# EAGLE board v1 (EAGLE 7.6.0)
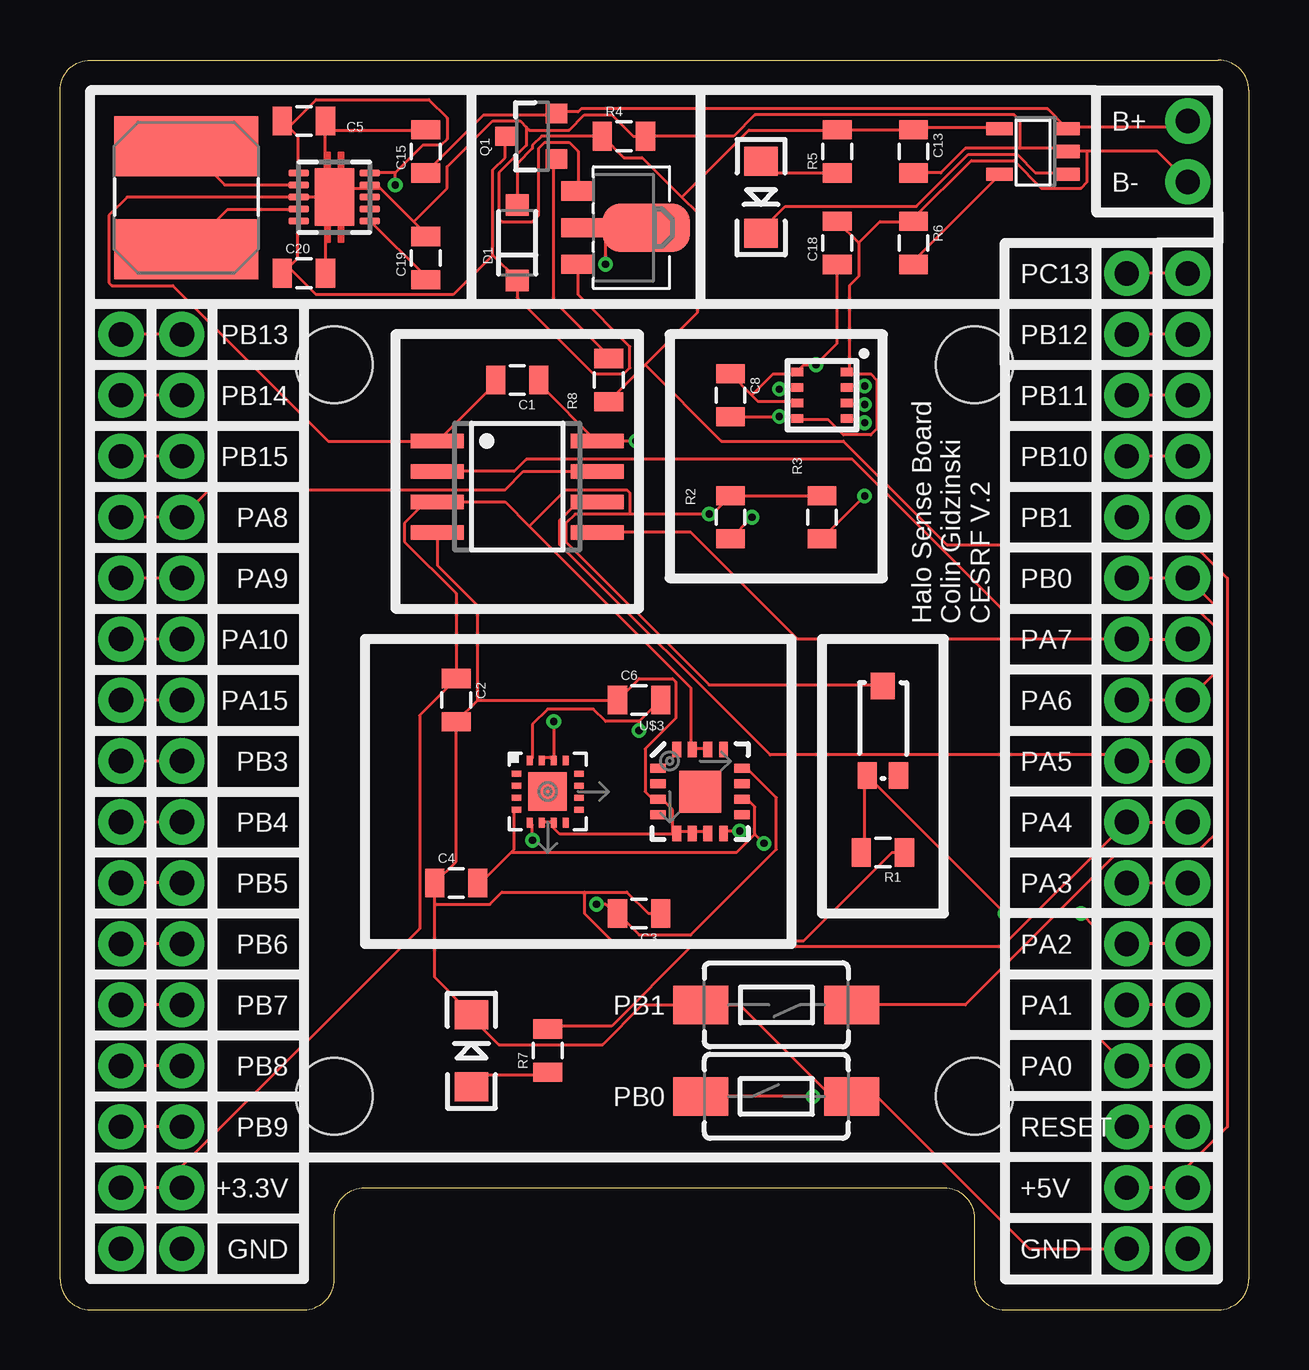
[diagram p0: board, top side]
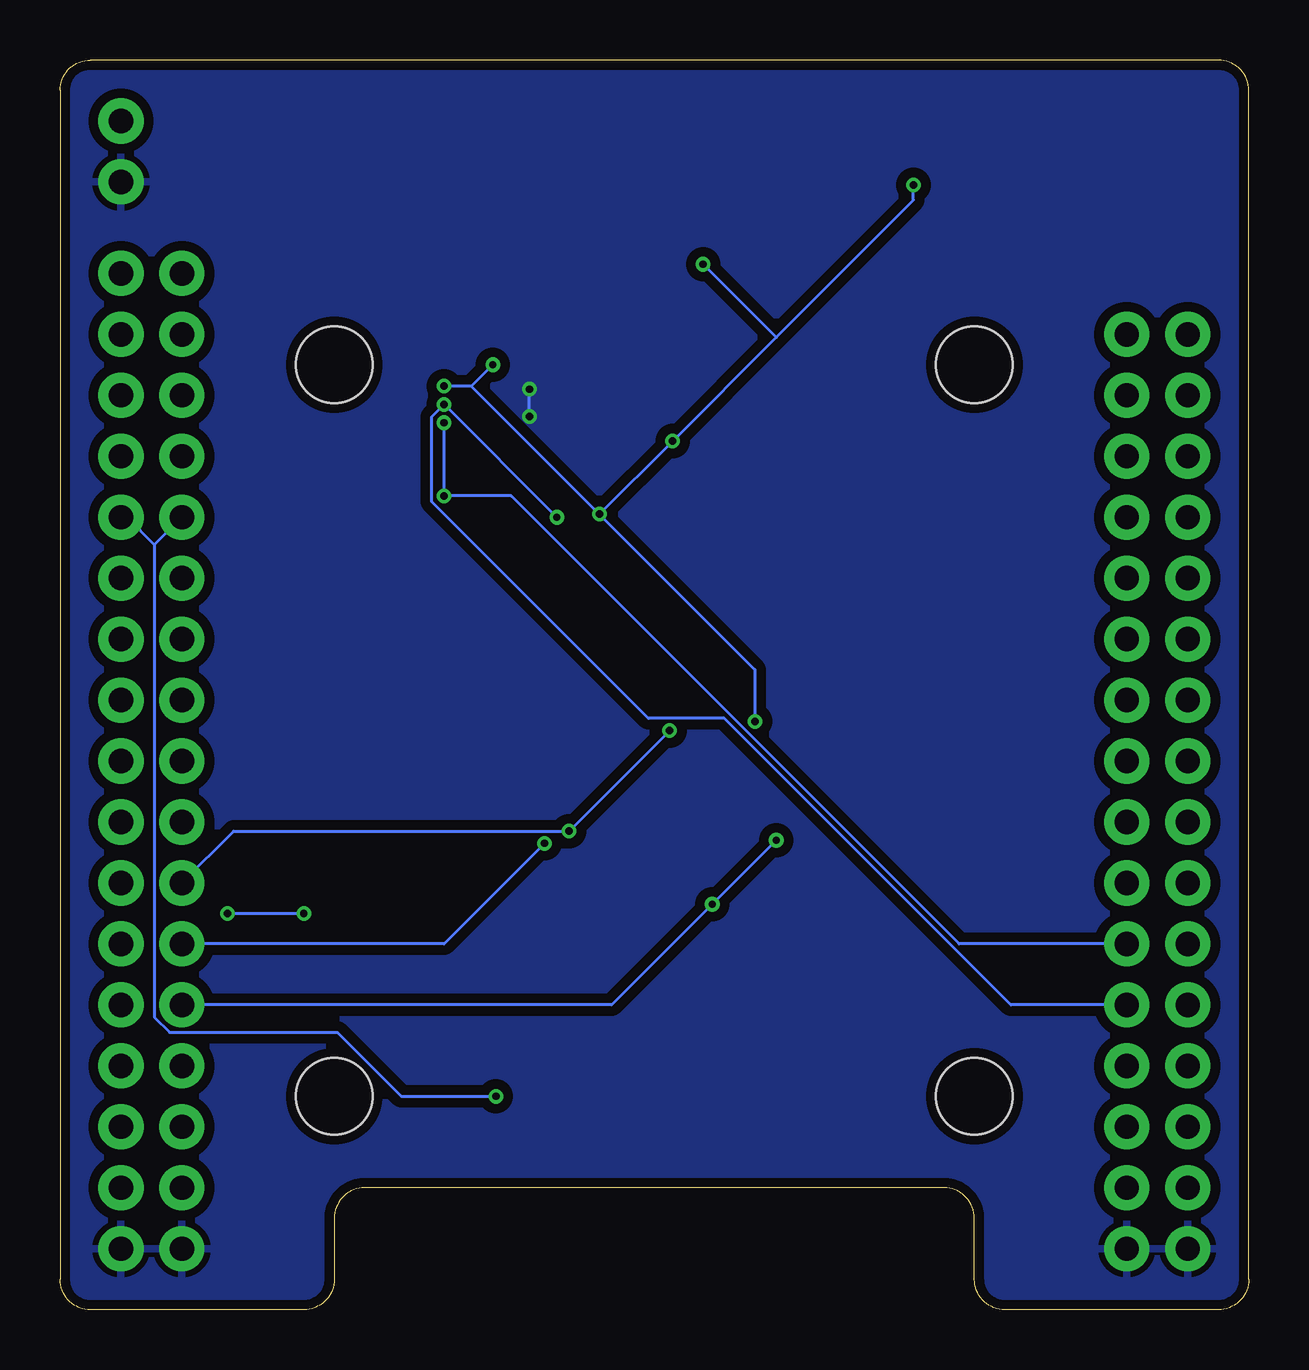
[diagram p1: board, bottom side, seen from below]

Size 49.53 x 52.07 mm. Coordinates in mm from the lower left corner, seen from the top.
Outline: 1.27,52.07 48.26,52.07 arc-90 49.53,50.8 49.53,1.27 arc-90 48.26,0 39.37,0 arc-90 38.1,1.27 38.1,3.81 arc90 36.83,5.08 12.7,5.08 arc90 11.43,3.81 11.43,1.27 arc-90 10.16,0 1.27,0 arc-90 0,1.27 0,50.8 arc-90 1.27,52.07
Copper layers (1*16): Top 0.035mm / dielectric 1.5mm / Bottom 0.035mm
Design rules "dirt_cheap_dirty_boards.v1": minimum track width 5mil, minimum drill 12mil, track to track 5mil, track to pad 5mil, pad to pad 5mil, via to via 5mil, smd to smd 0mil, copper to edge 10mil, drill to drill 10mil, minimum pad ring 10mil, minimum via ring 6mil, stop-mask expansion 2mil, vias tented up to drill 25mil, thermal gap 10mil
Holes 3.2 mm at 11.43,8.89 38.1,8.89 38.1,39.37 11.43,39.37
tRestrict: area 30.8,37.1 to 32.7,39.1

## Footprints (pad centres in the part's own frame; a part is rotated, then mirrored left to right if it is on the bottom)
0805 = smd 0.8 x 1.2: 1 -0.9,0; 2 0.9,0
SOD-123 = smd 0.9 x 0.95: A 1.575,0; C -1.575,0
LED-1206 = smd 1.2 x 1.4: A -1.5,0; C 1.5,0
DRC-S-PVSON-N10 = smd 0.28 x 0.85: 1 -1,-1.475; 2 -0.5,-1.475; 3 0,-1.475; 4 0.5,-1.475; 5 1,-1.475; 6 1,1.475; 7 0.5,1.475; 8 0,1.475; 9 -0.5,1.475; 10 -1,1.475 | smd 2.4 x 1.65: TH 0,0
1X02_NO_SILK = drill 1.016 pad 1.88: 1 0,0; 2 2.54,0
1X16_NO_SILK = drill 1.016 pad 1.88: 1 0,0; 2 2.54,0; 3 5.08,0; 4 7.62,0; 5 10.16,0; 6 12.7,0; 7 15.24,0; 8 17.78,0; 9 20.32,0; 10 22.86,0; 11 25.4,0; 12 27.94,0; 13 30.48,0; 14 33.02,0; 15 35.56,0; 16 38.1,0
1X17_NO_SILK = drill 1.016 pad 1.88: 1 0,0; 2 2.54,0; 3 5.08,0; 4 7.62,0; 5 10.16,0; 6 12.7,0; 7 15.24,0; 8 17.78,0; 9 20.32,0; 10 22.86,0; 11 25.4,0; 12 27.94,0; 13 30.48,0; 14 33.02,0; 15 35.56,0; 16 38.1,0; 17 40.64,0
SRN6045 = smd 2.5 x 6: 1 -2.175,-0.175; 2 2.125,-0.175
SOT23-3 = smd 0.8 x 0.9: 1 -0.95,-1; 2 0.95,-1; 3 0,1.1
TACTILE-SWITCH-1101NE = smd 2.3 x 1.6: 1 -3.15,0; 2 3.15,0
TEMT6000-SEN = smd 1.1 x 0.8: BASE -1.87,-0.65; EMITTER -1.87,0.65 | smd 1.1 x 1: COLLECTOR 1.86,0.01
SO08-JB = smd 0.6 x 2.2: 1 -1.905,-3.33; 2 -0.635,-3.33; 3 0.635,-3.33; 4 1.905,-3.33; 5 1.905,3.33; 6 0.635,3.33; 7 -0.635,3.33; 8 -1.905,3.33
SOT-89 = smd 0.8 x 1.4: 1 -1.524,-1.905; 3 1.524,-1.905 | smd 0.8 x 1.9: 2 0,-1.651 | smd 2.032 x 3.65: 4 0,0.94
BME280_LGA = smd 0.5 x 0.35: P$1 1.025,0.975; P$2 1.025,0.325; P$3 1.025,-0.325; P$4 1.025,-0.975; P$5 -1.025,-0.975; P$6 -1.025,-0.325; P$7 -1.025,0.325; P$8 -1.025,0.975
SOT23-5 = smd 0.55 x 1.1: 1 -0.95,-1.3; 2 0,-1.3; 3 0.95,-1.3; 4 0.95,1.5; 5 -0.95,1.5
LFCSP_LQ-16 = smd 0.4 x 0.25: 1 -1.3,0.75; 2 -1.3,0.25; 3 -1.3,-0.25; 4 -1.3,-0.75; 9 1.3,-0.75; 10 1.3,-0.25; 11 1.3,0.25; 12 1.3,0.75 | smd 0.25 x 0.4: 5 -0.75,-1.3; 6 -0.25,-1.3; 7 0.25,-1.3; 8 0.75,-1.3; 13 0.75,1.3; 14 0.25,1.3; 15 -0.25,1.3; 16 -0.75,1.3 | smd 1.6 x 1.6: EXP 0,0
LFCSP-16 = smd 1.75 x 1.75: 0 0,0 | smd 0.65 x 0.37: 1 -1.75,0.975; 2 -1.75,0.325; 3 -1.75,-0.325; 4 -1.75,-0.975; 9 1.75,-0.975; 10 1.75,-0.325; 11 1.75,0.325; 12 1.75,0.975 | smd 0.37 x 0.65: 5 -0.975,-1.75; 6 -0.325,-1.75; 7 0.325,-1.75; 8 0.975,-1.75; 13 0.975,1.75; 14 0.325,1.75; 15 -0.325,1.75; 16 -0.975,1.75

## Placement (x,y rotation side)
C1  0.1uf  [0805]  19.05,38.74 180 top
C2  0.1uf  [0805]  16.51,25.4 270 top
C3  0.1uf  [0805]  24.13,16.51 180 top
C4  0.1uf  [0805]  16.51,17.78 0 top
C5  10uf  [0805]  10.16,49.53 0 top
C6  0.1uf  [0805]  24.13,25.4 0 top
C8  0.1uf  [0805]  27.94,38.1 270 top
C13  10uf  [0805]  35.56,48.26 270 top
C15  10uf  [0805]  15.24,48.26 90 top
C18  10uf  [0805]  32.38,44.45 90 top
C19  0.1uf  [0805]  15.24,43.82 90 top
C20  10uf  [0805]  10.16,43.18 0 top
D1  [SOD-123]  19.05,44.45 90 top
D2  PA4  [LED-1206]  17.15,10.8 90 top
D3  Battery  [LED-1206]  29.21,46.35 270 top
IC2  TPS6300  [DRC-S-PVSON-N10]  11.43,46.35 270 top
J6  [1X02_NO_SILK]  46.99,49.53 270 top
J_LEFT  [1X16_NO_SILK]  2.54,2.54 90 top
J_LEFT1  [1X16_NO_SILK]  5.08,2.54 90 top
J_RIGHT  [1X17_NO_SILK]  44.45,2.54 90 top
J_RIGHT1  [1X17_NO_SILK]  46.99,2.54 90 top
L2  1.5uH  [SRN6045]  5.08,46.35 90 top
Q1  [SOT23-3]  19.68,48.9 90 top
R1  10k  [0805]  34.29,19.05 180 top
R2  4.7K  [0805]  27.94,33.02 90 top
R3  4.7K  [0805]  31.75,33.02 90 top
R4  10k  [0805]  23.49,48.9 0 top
R5  220  [0805]  32.38,48.26 90 top
R6  10k  [0805]  35.56,44.45 270 top
R7  220  [0805]  20.32,10.8 90 top
R8  22  [0805]  22.86,38.74 270 top
S1  SWITCH-MOMENTARY-2SMD-1101NE  [TACTILE-SWITCH-1101NE]  29.85,12.7 180 top
S2  SWITCH-MOMENTARY-2SMD-1101NE  [TACTILE-SWITCH-1101NE]  29.85,8.89 0 top
U1  LIGHTSENSORTEMT6000  [TEMT6000-SEN]  34.29,24.13 90 top
U2  IS25LQ080B-JB  [SO08-JB]  19.05,34.29 270 top
U3  XC6206P302PR-sot89  [SOT-89]  23.49,45.09 270 top
U7  BME280  [BME280_LGA]  31.75,38.1 0 top
U$1  MCP73831  [SOT23-5]  40.64,48.26 90 top
U$2  ADXL377  [LFCSP_LQ-16]  20.32,21.59 0 top
U$3  ADXL330  [LFCSP-16]  26.67,21.59 0 top

## Library data of the parts
C1-C6 C8 C13 C15 C18-C20 = SparkFun-Capacitors
D1 = SparkFun-DiscreteSemi
D2 D3 = SparkFun-LED
IC2 = texas; MPN: TPS63000DRCTG4; OC_FARNELL: 1511852; OC_NEWARK: 59M7217
J6 J_LEFT J_LEFT1 J_RIGHT J_RIGHT1 = SparkFun-Connectors
L2 = SparkFun-Passives; PROD_ID: NDUC-11627
Q1 = SparkFun-DiscreteSemi; PROD_ID: TRANS-08285
R1-R8 = SparkFun-Resistors
S1 S2 = SparkFun-Electromechanical; PROD_ID: SWCH-00815
U1 U$2 U$3 = SparkFun-Sensors
U2 = memory-issi
U3 = Seeed-OPL-ic; MPN: XC6206P302PR
U7 = BME280ComponentLibrary; PROD_ID: IC-13090
U$1 = GeekAmmo

## Nets
3.3V: C1.1 C2.1 C5.1 C8.1 C18.1 IC2.1 IC2.10 J_LEFT1.2 J_LEFT.2 R2.2 R3.2 U1.COLLECTOR U2.3 U2.8 U3.2 U3.4 U7.P$2 U7.P$6 U7.P$8 U$2.14 U$2.15 U$3.14 U$3.15
5V: C13.1 D1.A J_RIGHT1.2 J_RIGHT.2 R4.1 R5.2 R8.2 U$1.4
GND: C1.2 C2.2 C3.1 C4.1 C5.2 C6.1 C8.2 C13.2 C15.2 C18.2 C19.2 C20.2 D2.C IC2.3 IC2.9 IC2.TH J6.2 J_LEFT1.1 J_LEFT.1 J_RIGHT1.1 J_RIGHT.1 R1.1 R4.2 R6.1 S1.2 S2.2 U2.1 U2.4 U3.1 U7.P$1 U7.P$5 U7.P$7 U$1.2 U$2.6 U$2.7 U$3.3 U$3.5 U$3.6 U$3.7
N$1: IC2.4 L2.1
N$3: IC2.2 L2.2
N$4: C20.1 D1.C IC2.5 Q1.3 U3.3
N$5: D2.A R7.1
N$6: Q1.1 R8.1
N$13: D3.A R5.1
N$14: C19.1 IC2.6 IC2.7 IC2.8
N$17: D3.C U$1.1
N$18: R6.2 U$1.5
PA0: J_RIGHT1.4 J_RIGHT.4 R1.2 U1.EMITTER
PA1: C3.2 J_RIGHT1.5 J_RIGHT.5 U$2.5 U$3.12
PA2: C4.2 J_RIGHT1.6 J_RIGHT.6 U$2.4 U$3.10
PA3: C6.2 J_RIGHT1.7 J_RIGHT.7 U$2.16 U$3.8
PA4: J_RIGHT1.8 J_RIGHT.8 R7.2
PA5: J_RIGHT1.9 J_RIGHT.9 U2.6
PA6: J_RIGHT1.10 J_RIGHT.10 U2.2
PA7: J_RIGHT1.11 J_RIGHT.11 U2.5
PA8: J_LEFT1.13 J_LEFT.13 U2.7
PA9: J_LEFT1.12 J_LEFT.12
PA10: J_LEFT1.11 J_LEFT.11
PA15: J_LEFT1.10 J_LEFT.10
PB0: J_RIGHT1.12 J_RIGHT.12 S1.1
PB1: J_RIGHT1.13 J_RIGHT.13 S2.1
PB3: J_LEFT1.9 J_LEFT.9
PB4: J_LEFT1.8 J_LEFT.8
PB5: J_LEFT1.7 J_LEFT.7
PB6: J_LEFT1.6 J_LEFT.6 R3.1 U7.P$4
PB7: J_LEFT1.5 J_LEFT.5 R2.1 U7.P$3
PB8: J_LEFT1.4 J_LEFT.4
PB9: J_LEFT1.3 J_LEFT.3
PB10: J_RIGHT1.14 J_RIGHT.14
PB11: J_RIGHT1.15 J_RIGHT.15
PB12: J_RIGHT1.16 J_RIGHT.16
PB13: J_LEFT1.16 J_LEFT.16
PB14: J_LEFT1.15 J_LEFT.15
PB15: J_LEFT1.14 J_LEFT.14
PC13: J_RIGHT1.17 J_RIGHT.17
RESET: J_RIGHT1.3 J_RIGHT.3
V_BATT: C15.1 J6.1 Q1.2 U$1.3

## Tracks (layer width: path | path; a pad name or v marks a point on that pad's centre or on a via)
3.3V  (via drill 0.3)
  Top 0.127: U3.4 22.73,45.09 | 9.52,49.28 9.27,49.53 C5.1 9.52,49.28 | 9.52,49.28 9.91,48.9 9.91,47.37 IC2.1 | 13.97,47.37 12.95,47.37 IC2.10 | 13.97,47.37 15.11,48.51 15.87,48.51 16.13,48.77 16.13,49.66 15.37,50.42 10.67,50.42 9.52,49.28 | C1.1 20.07,38.74 20.07,38.48 22.35,36.2 U2.8 v24,36.2 | U$2.15 20.19,22.99 20.45,22.99 U$2.14 20.57,22.99 v20.57,24.51 | 28.83,38.1 27.94,38.99 C8.1 | 28.83,38.1 29.08,37.85 30.61,37.85 U7.P$6 | 28.83,38.1 29.72,38.99 30.61,38.99 U7.P$8 30.73,39.12 30.99,39.37 v31.5,39.37 32.38,40.26 C18.1 | v33.53,38.48 32.89,38.48 U7.P$2 | v13.97,46.86 13.97,47.37 | v22.73,43.56 22.73,45.09 | 22.73,45.09 U3.2 | 23.75,33.15 v27.05,33.15 27.18,33.15 27.94,33.91 | 23.75,33.15 21.46,33.15 21.08,32.77 21.08,32 27.05,26.04 34.16,26.04 U1.COLLECTOR | 27.94,33.91 31.75,33.91 R3.2 | 27.94,33.91 R2.2 | J_LEFT.2 J_LEFT1.2 5.08,5.97 14.99,15.88 14.99,24.77 C2.1 16.51,29.84 14.35,32 14.35,32.77 15.24,33.66 U2.3 18.54,33.66 19.56,32.64 | U$3.14 26.92,23.37 26.42,23.37 U$3.15 26.29,23.37 26.29,25.91 19.56,32.64 | 23.75,33.15 23.75,34.04 23.62,34.16 21.08,34.16 19.56,32.64
  Bottom 0.127: 32.38,38.48 v33.53,38.48 | v31.5,39.37 32.38,38.48 | v20.57,24.51 20.57,26.67 v27.05,33.15 | 32.38,38.48 v27.05,33.15 | v27.05,33.15 v24,36.2 19.68,40.51 | v13.97,46.86 13.97,46.23 19.68,40.51 | 19.68,40.51 v22.73,43.56
5V
  Top 0.127: J_RIGHT.2 J_RIGHT1.2 46.99,5.97 48.64,7.62 48.64,30.48 47.24,31.88 36.96,31.88 32.64,36.2 27.56,36.2 24.38,39.37 | U$1.4 39.12,49.28 35.56,49.28 C13.1 R5.2 | D1.A 19.05,47.75 19.68,48.39 19.68,48.51 20.07,48.9 R4.1 22.61,48.9 23.49,48.01 24.26,48.01 25.91,46.35 | 24.38,39.37 26.54,41.53 26.54,45.72 25.91,46.35 | 24.38,39.37 R8.2 | R5.2 28.7,49.15 25.91,46.35 | R5.2
GND  (via drill 0.3)
  Top 0.127: C1.2 18.03,38.74 18.03,38.48 15.75,36.2 U2.1 11.18,36.2 4.7,42.67 2.16,42.67 2.03,42.8 2.03,45.59 2.79,46.35 IC2.3 11.05,46.35 | 11.05,46.35 11.05,43.18 C20.2 | 14.73,45.34 13.34,46.74 12.95,46.74 IC2.9 12.83,46.74 11.81,46.74 IC2.TH 11.05,46.35 | 14.73,45.34 15.24,44.83 C19.2 | 19.43,49.28 19.18,49.53 18.03,49.53 16.13,47.63 16.13,46.74 14.73,45.34 | 19.43,49.28 19.56,49.15 21.21,49.15 21.84,49.78 22.99,49.78 23.88,48.9 R4.2 28.07,48.9 28.96,49.78 39.75,49.78 40.01,49.53 40.01,48.39 | 11.05,46.35 11.05,49.15 | 11.05,49.15 11.05,49.53 C5.2 11.05,49.15 | 11.05,49.15 C15.2 | U3.1 21.59,48.26 21.21,48.64 20.19,48.64 19.94,48.39 19.94,45.59 19.68,45.34 18.41,45.34 18.29,45.47 18.29,47.37 19.43,48.51 19.43,49.28 | 42.8,48.26 45.72,48.26 J6.2 | 42.8,48.26 U$1.2 41.91,48.26 41.78,48.39 40.01,48.39 | 40.01,48.39 37.72,48.39 36.7,47.37 35.56,47.37 C13.2 | C8.2 v29.97,37.21 30.61,37.21 U7.P$5 30.73,37.08 32,37.08 32.64,36.45 33.78,36.45 34.04,36.7 34.04,38.74 33.78,38.99 32.89,38.99 U7.P$1 32.89,39.12 32.89,42.67 33.27,43.05 33.27,44.45 | v29.97,38.35 30.61,38.35 U7.P$7 | 33.27,44.45 C18.2 | 33.27,44.45 34.16,45.34 R6.1 35.56,45.47 37.97,47.88 39.75,47.88 40.89,46.74 42.54,46.74 42.8,46.99 42.8,48.26 | U$2.6 20.19,20.32 20.45,20.32 U$2.7 20.57,20.19 20.57,20.07 20.83,19.81 25.53,19.81 | 25.53,19.81 25.65,19.81 U$3.5 | U$3.5 25.78,19.94 26.29,19.94 U$3.6 26.42,19.94 26.92,19.94 U$3.7 | 25.53,19.81 25.53,20.83 25.15,21.21 25.02,21.21 U$3.3 24.89,21.34 24.64,21.34 24.38,21.59 24.38,23.37 25.65,24.64 25.65,26.16 25.53,26.29 24.13,26.29 23.24,25.4 C6.1 17.4,25.4
  Top 0.127: 25.53,19.81 U$3.5 | 15.62,16.89 15.62,13.84 17.15,12.32 D2.C 17.15,12.19 18.29,11.05 22.61,11.05 24.26,12.7 S1.2 28.32,12.7 32.13,8.89 S2.2 34.04,8.89 40.39,2.54 J_RIGHT.1 | 15.62,16.89 15.62,17.78 | 15.62,17.78 16.51,18.67 C2.2 16.51,24.51 17.4,25.4 | 15.62,17.78 C4.1 | C3.1 24.51,16.51 23.62,17.4 21.84,17.4 | 21.84,17.4 18.41,17.4 17.91,16.89 15.62,16.89 | R1.1 34.67,19.05 30.99,15.37 22.99,15.37 21.84,16.51 21.84,17.4 | 17.4,25.4 17.4,29.34 15.75,30.99 15.75,32.38 U2.4
  Bottom 0.127: v29.97,37.21 v29.97,38.35
  pour Bottom (isolate 0.406, rank 2): 0,52.07 49.53,52.07 49.53,0 0,0
N$1
  Top 0.127: IC2.4 9.91,45.85 6.98,45.85 5.33,44.2 L2.1
N$3
  Top 0.127: IC2.2 9.91,46.86 6.86,46.86 5.33,48.39 L2.2
N$4
  Top 0.127: 9.52,43.43 9.27,43.18 C20.1 9.52,43.43 | 9.52,43.43 9.91,43.82 9.91,45.34 IC2.5 | 18.03,43.94 18.03,47.5 18.54,48.01 18.54,48.9 Q1.3 | 18.03,43.94 19.05,42.93 D1.C 19.05,42.16 22.23,38.99 23.49,38.99 23.75,39.24 23.75,40.13 21.59,42.29 U3.3 | 9.52,43.43 10.67,42.29 16.38,42.29 18.03,43.94
N$5
  Top 0.127: R7.1 20.32,9.78 17.53,9.78 17.15,9.4 D2.A
N$6
  Top 0.127: Q1.1 20.57,47.88 20.57,42.04 22.86,39.75 R8.1
N$13
  Top 0.127: R5.1 32.38,47.37 29.59,47.37 29.21,47.75 D3.A
N$14
  Top 0.127: IC2.8 12.95,46.35 12.95,45.97 IC2.7 12.95,45.85 12.95,45.47 IC2.6 12.95,45.34 15.24,43.05 C19.1
N$17
  Top 0.127: U$1.1 41.91,47.37 40.64,47.37 39.88,48.13 37.85,48.13 35.69,45.97 30.23,45.97 29.21,44.96 D3.C
N$18
  Top 0.127: R6.2 35.56,43.69 39.12,47.24 U$1.5
PA0  (via drill 0.3)
  Top 0.127: J_RIGHT1.4 J_RIGHT.4 43.18,11.43 43.18,15.88 v42.54,16.51 | R1.2 33.4,19.05 33.53,19.18 33.53,22.23 U1.EMITTER 33.65,22.23 v39.37,16.51
  Bottom 0.127: v42.54,16.51 v39.37,16.51
PA1  (via drill 0.3)
  Top 0.127: J_RIGHT1.5 J_RIGHT.5 | v19.68,19.56 19.68,20.19 U$2.5 | v22.35,16.89 22.73,16.89 23.11,16.51 C3.2 23.24,16.51 24.13,15.62 26.29,15.62 29.85,19.18 29.85,21.34 28.7,22.48 28.45,22.48 U$3.12
  Bottom 0.127: v19.68,19.56 v22.35,16.89 26.54,12.7 J_RIGHT.5
PA2  (via drill 0.3)
  Top 0.127: J_RIGHT1.6 J_RIGHT.6 | 18.8,19.05 17.53,17.78 C4.2 | 18.8,19.05 18.92,19.18 18.92,20.83 U$2.4 | 28.96,19.81 28.96,20.95 28.7,21.21 28.45,21.21 U$3.10 | 28.96,19.81 28.19,19.05 18.8,19.05 | 28.96,19.81 v29.34,19.43
  Bottom 0.127: J_RIGHT.6 33.53,15.24 v29.34,19.43
PA3  (via drill 0.3)
  Top 0.127: 24.13,24.51 22.73,24.51 22.23,25.02 20.32,25.02 19.68,24.38 19.68,22.99 U$2.16 | 24.13,24.51 25.02,25.4 C6.2 | v28.32,19.94 27.69,19.94 U$3.8 | v24.13,24.13 24.13,24.51 | J_RIGHT.7 J_RIGHT1.7
  Bottom 0.127: J_RIGHT.7 42.29,19.94 v28.32,19.94 v24.13,24.13
PA4
  Top 0.127: R7.2 20.32,11.81 22.99,11.81 26.29,15.11 39.24,15.11 J_RIGHT.8 J_RIGHT1.8
PA5
  Top 0.127: U2.6 21.59,33.66 20.83,32.89 20.83,31.88 29.59,23.11 44.2,23.11 J_RIGHT.9 J_RIGHT1.9
PA6
  Top 0.127: U2.2 18.92,34.93 19.43,35.43 33.02,35.43 39.37,29.08 47.5,29.08 48.13,28.45 48.13,26.54 J_RIGHT1.10 J_RIGHT.10
PA7
  Top 0.127: U2.5 26.29,32.38 30.73,27.94 J_RIGHT.11 J_RIGHT1.11
PA8
  Top 0.127: U2.7 19.3,34.93 18.54,34.16 6.22,34.16 J_LEFT1.13 J_LEFT.13
PA9
  Top 0.127: J_LEFT1.12 J_LEFT.12
PA10
  Top 0.127: J_LEFT1.11 J_LEFT.11
PA15
  Top 0.127: J_LEFT1.10 J_LEFT.10
PB0
  Top 0.127: S1.1 37.72,12.7 44.2,19.18 47.5,19.18 48.39,20.07 48.39,29.08 J_RIGHT1.12 J_RIGHT.12
PB1  (via drill 0.3)
  Top 0.127: v31.37,8.89 S2.1
  Bottom 0.127: v31.37,8.89 35.31,8.89 37.97,11.56 44.96,11.56 45.59,12.19 45.59,31.88 | J_RIGHT.13 45.59,31.88 | J_RIGHT1.13 46.74,33.02 45.59,31.88
PB3
  Top 0.127: J_LEFT1.9 J_LEFT.9
PB4
  Top 0.127: J_LEFT1.8 J_LEFT.8
PB5
  Top 0.127: J_LEFT1.7 J_LEFT.7
PB6  (via drill 0.3)
  Top 0.127: v33.53,36.96 33.4,37.08 32.89,37.08 U7.P$4 | v33.53,33.91 R3.1 | J_LEFT1.6 J_LEFT.6
  Bottom 0.127: v33.53,36.96 v33.53,33.91 30.73,33.91 12.07,15.24 J_LEFT1.6
PB7  (via drill 0.3)
  Top 0.127: v33.53,37.72 32.89,37.72 U7.P$3 | v28.83,33.02 R2.1 | J_LEFT1.5 J_LEFT.5
  Bottom 0.127: v28.83,33.02 v33.53,37.72 34.04,37.21 34.04,33.66 25.02,24.64 21.84,24.64 9.91,12.7 J_LEFT1.5
PB8
  Top 0.127: J_LEFT1.4 J_LEFT.4
PB9
  Top 0.127: J_LEFT1.3 J_LEFT.3
PB10
  Top 0.127: J_RIGHT1.14 J_RIGHT.14
PB11
  Top 0.127: J_RIGHT1.15 J_RIGHT.15
PB12
  Top 0.127: J_RIGHT1.16 J_RIGHT.16
PB13
  Top 0.127: J_LEFT1.16 J_LEFT.16
PB14
  Top 0.127: J_LEFT1.15 J_LEFT.15
PB15
  Top 0.127: J_LEFT1.14 J_LEFT.14
PC13
  Top 0.127: J_RIGHT1.17 J_RIGHT.17
RESET
  Top 0.127: J_RIGHT1.3 J_RIGHT.3
V_BATT
  Top 0.127: C15.1 15.24,47.37 17.65,49.78 20.57,49.78 Q1.2 20.7,49.91 21.59,49.91 21.72,50.04 41.15,50.04 41.91,49.28 U$1.3 42.04,49.28 46.74,49.28 J6.1

## Text on the board
tNames: B+ | B- | PC13 | PB13 | PB12 | PB14 | PB11 | PB15 | PB10 | PA8 | PB1 | PA9 | PB0 | Halo Sense Board / Colin Gidzinski / CESRF V.2 | PA10 | PA7 | PA15 | PA6 | PB3 | PA5 | PB4 | PA4 | PB5 | PA3 | PB6 | PA2 | PB7 | PB1 | PA1 | PB8 | PA0 | PB0 | PB9 | RESET | +3.3V | +5V | GND | GND